# Altium PCB MOTION DETECTOR LIGHT.PcbDoc
Units mm, origin at the board's own origin, x right, y up, seen from the top; angles counter-clockwise.
Board outline 60.5 x 41.5 mm, 4 copper layers (Top Layer, Layer 1, Layer 2, Bottom Layer), stack 1.569 mm thick; 23 components, 15 nets, 73 pads, 20 vias.
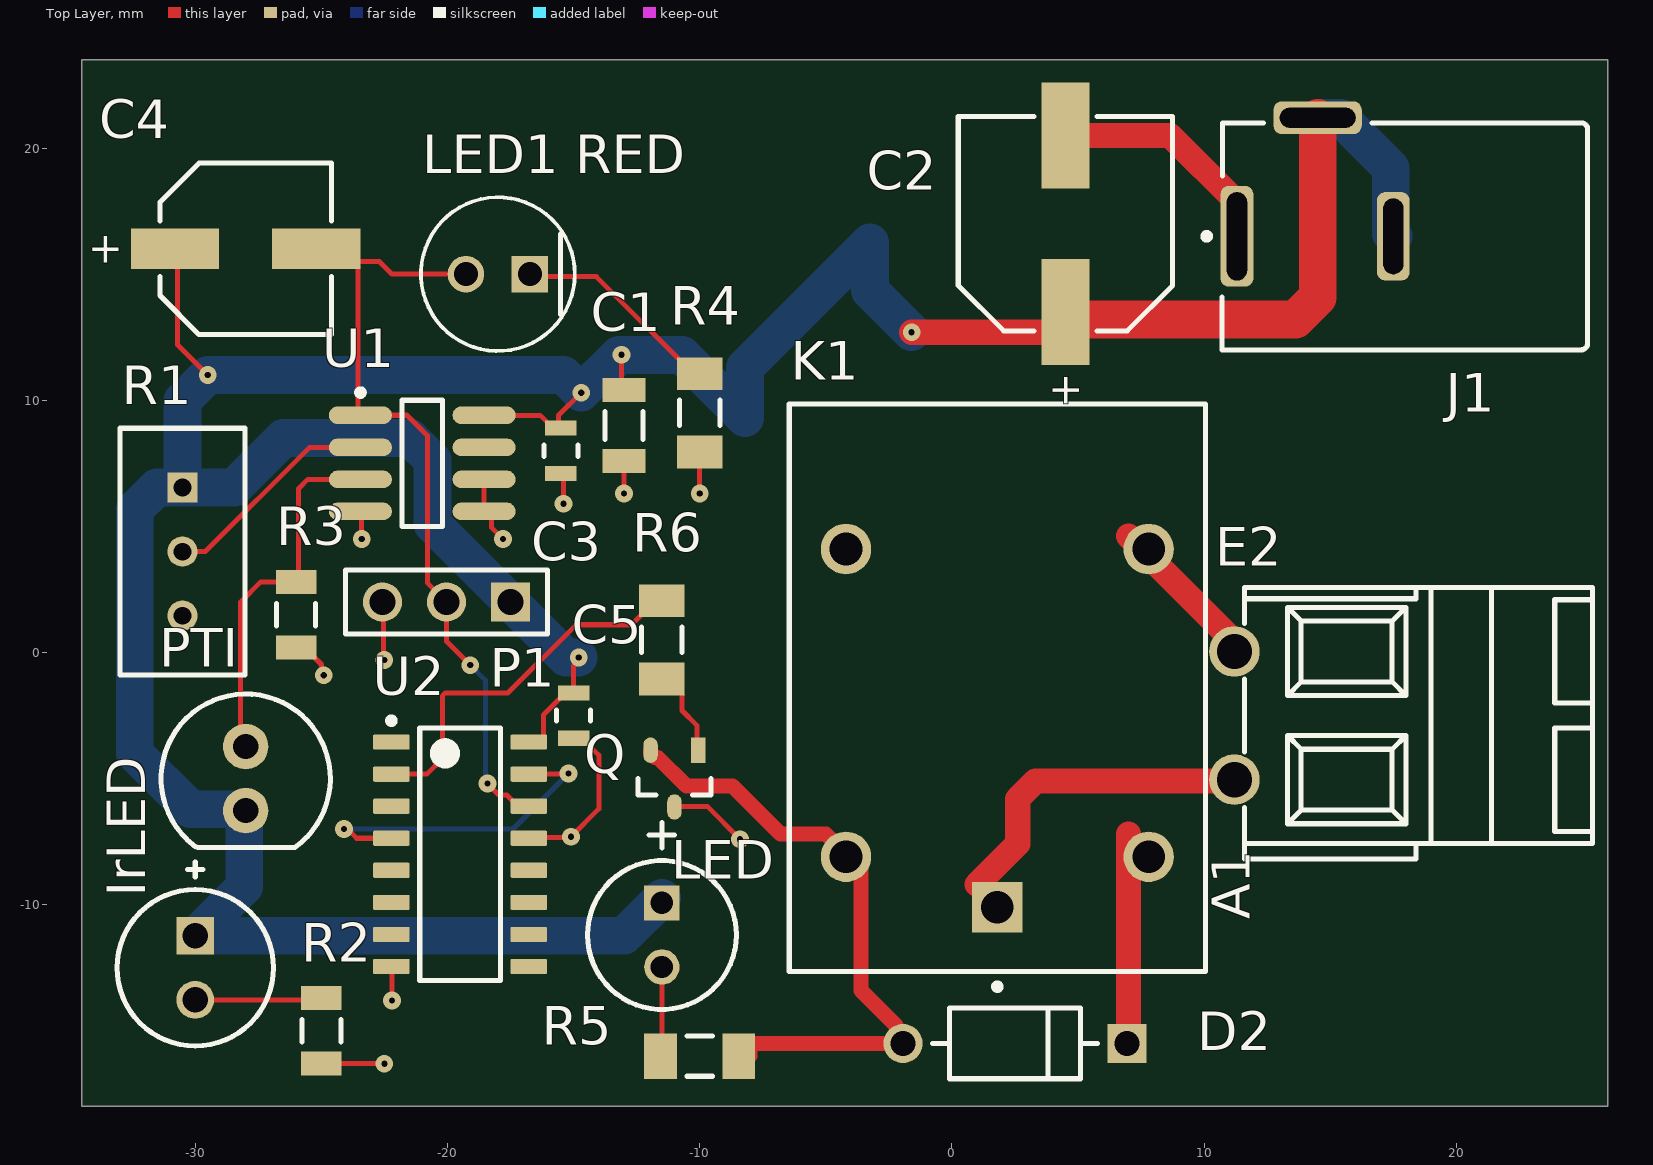
[diagram p0: Top Layer view]
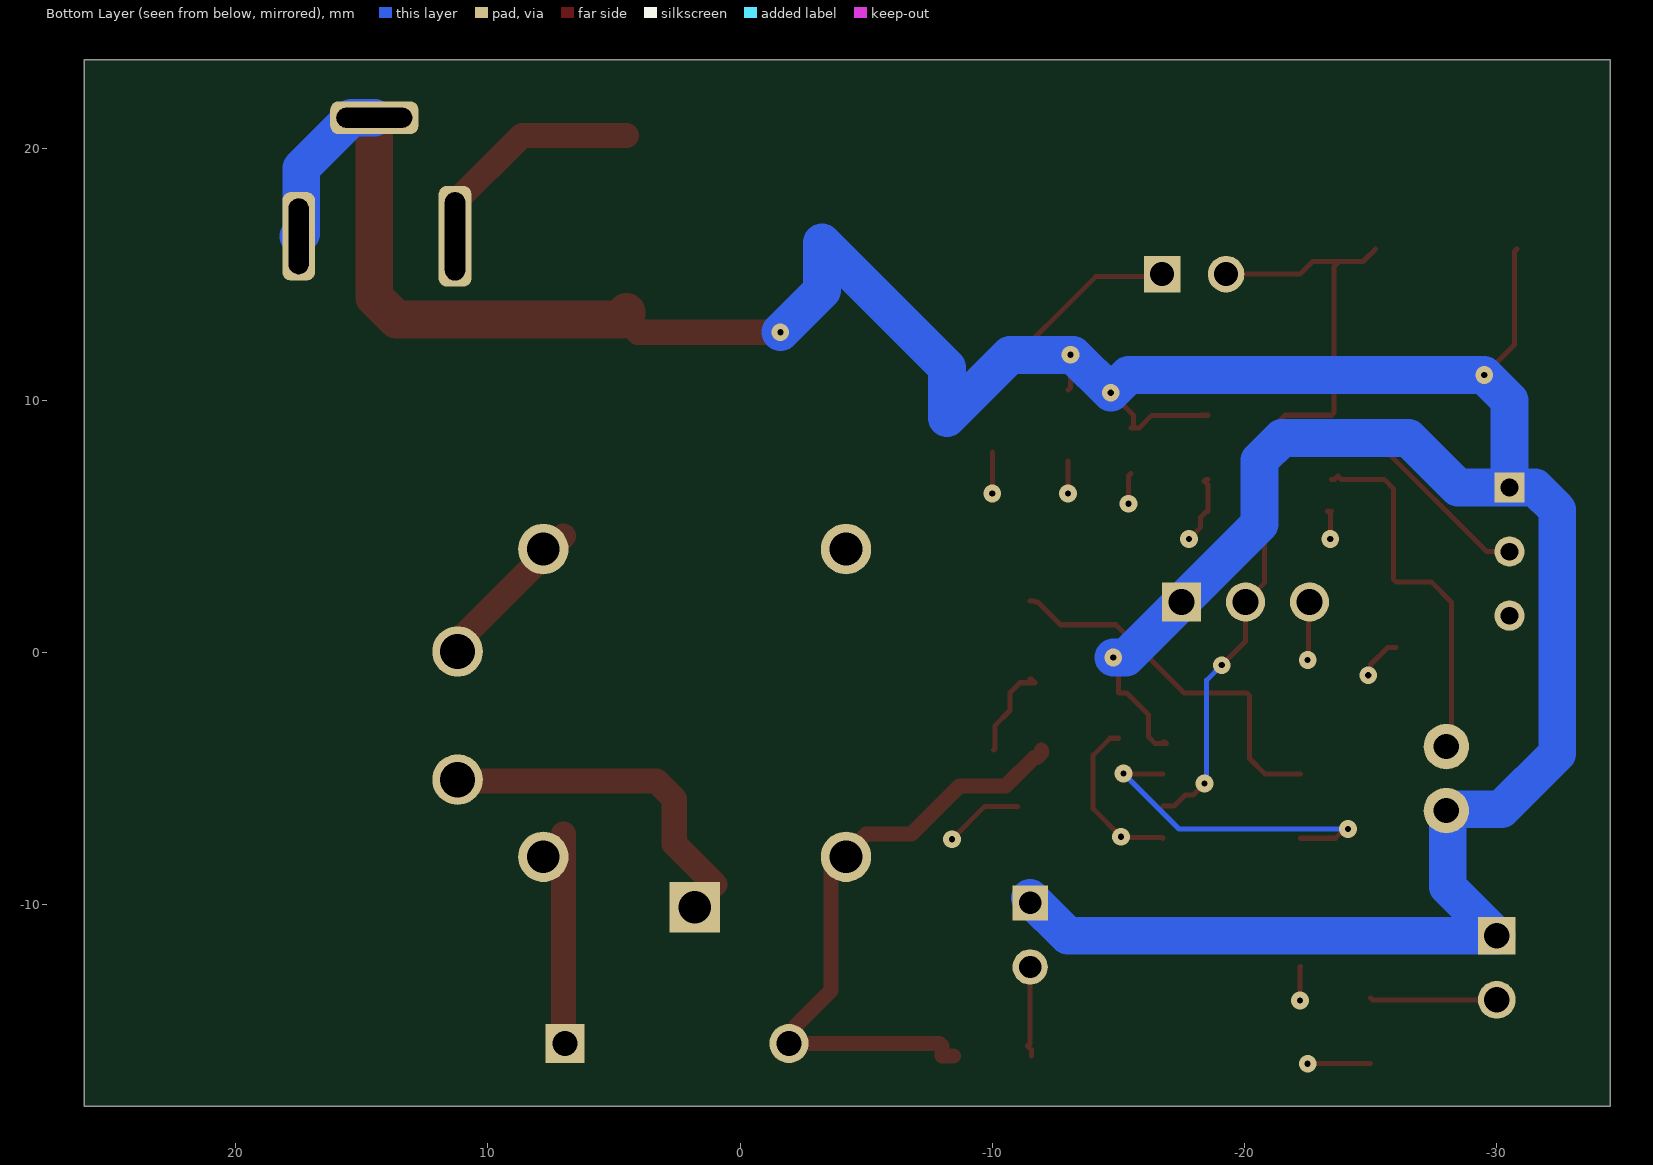
[diagram p1: Bottom Layer view, seen from below]
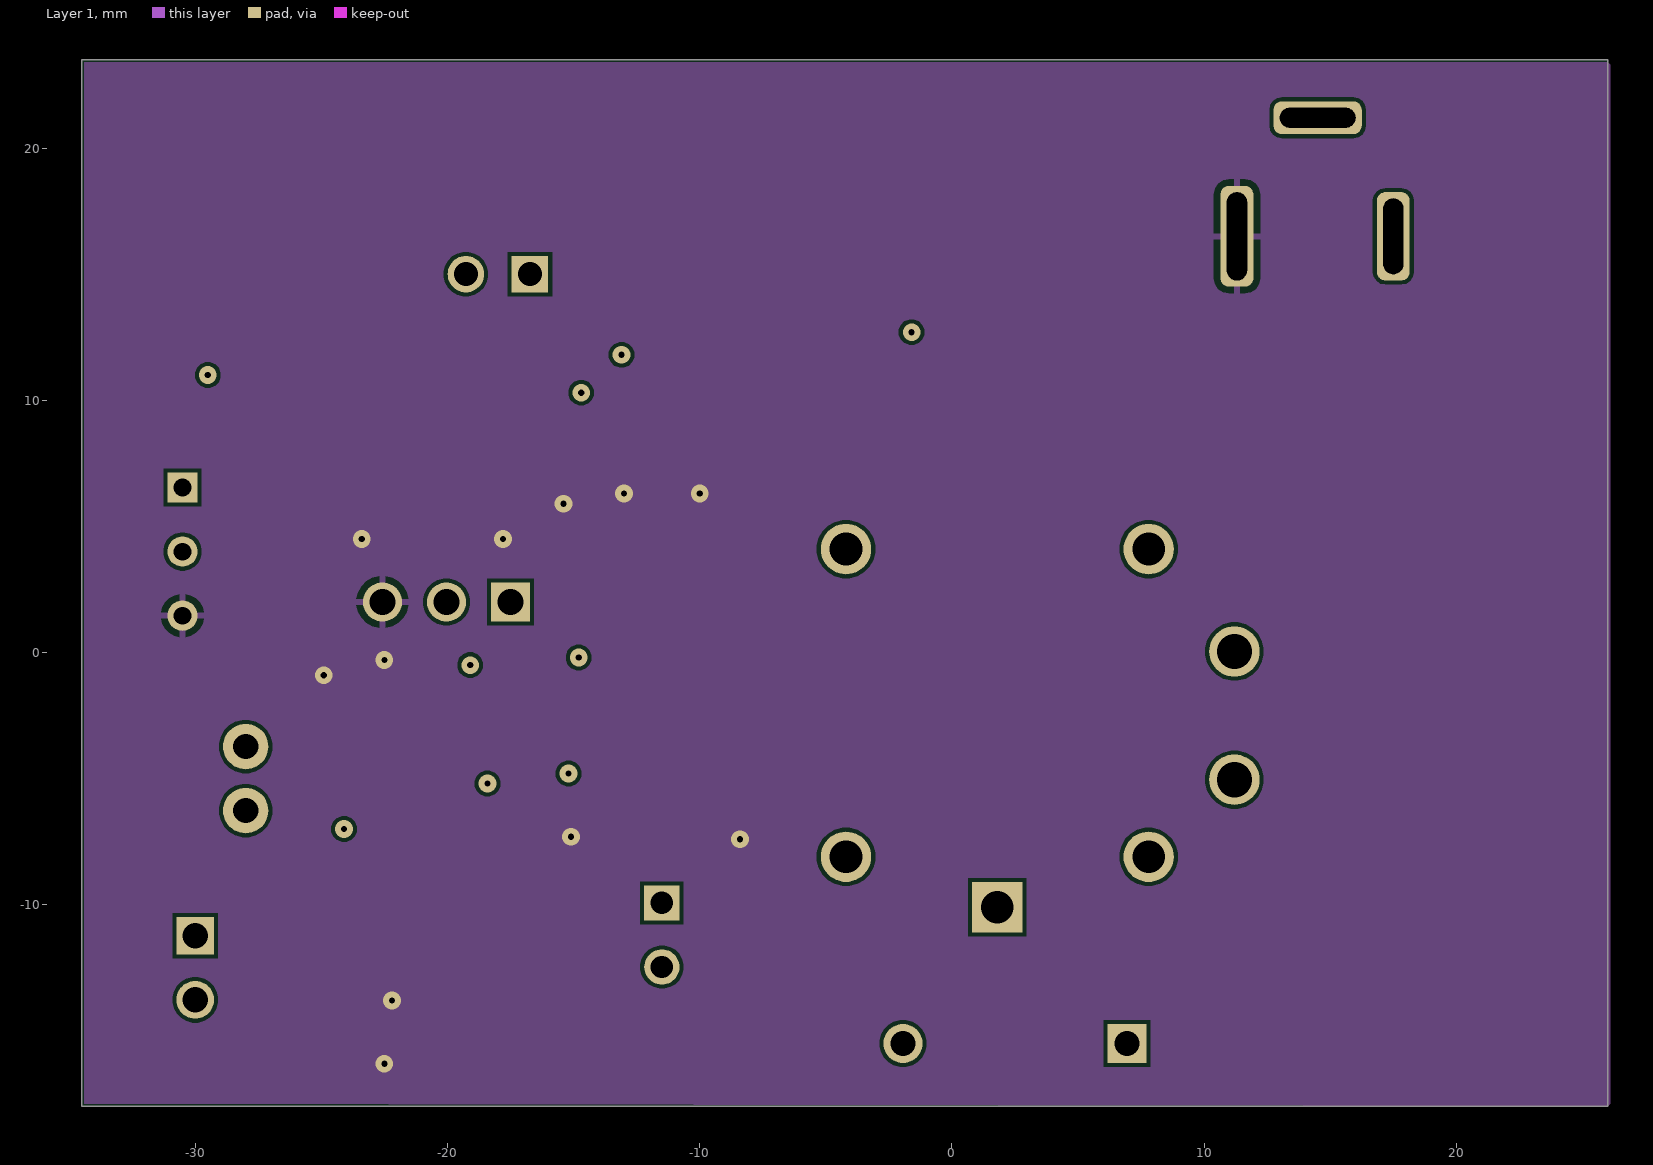
[diagram p2: Layer 1]
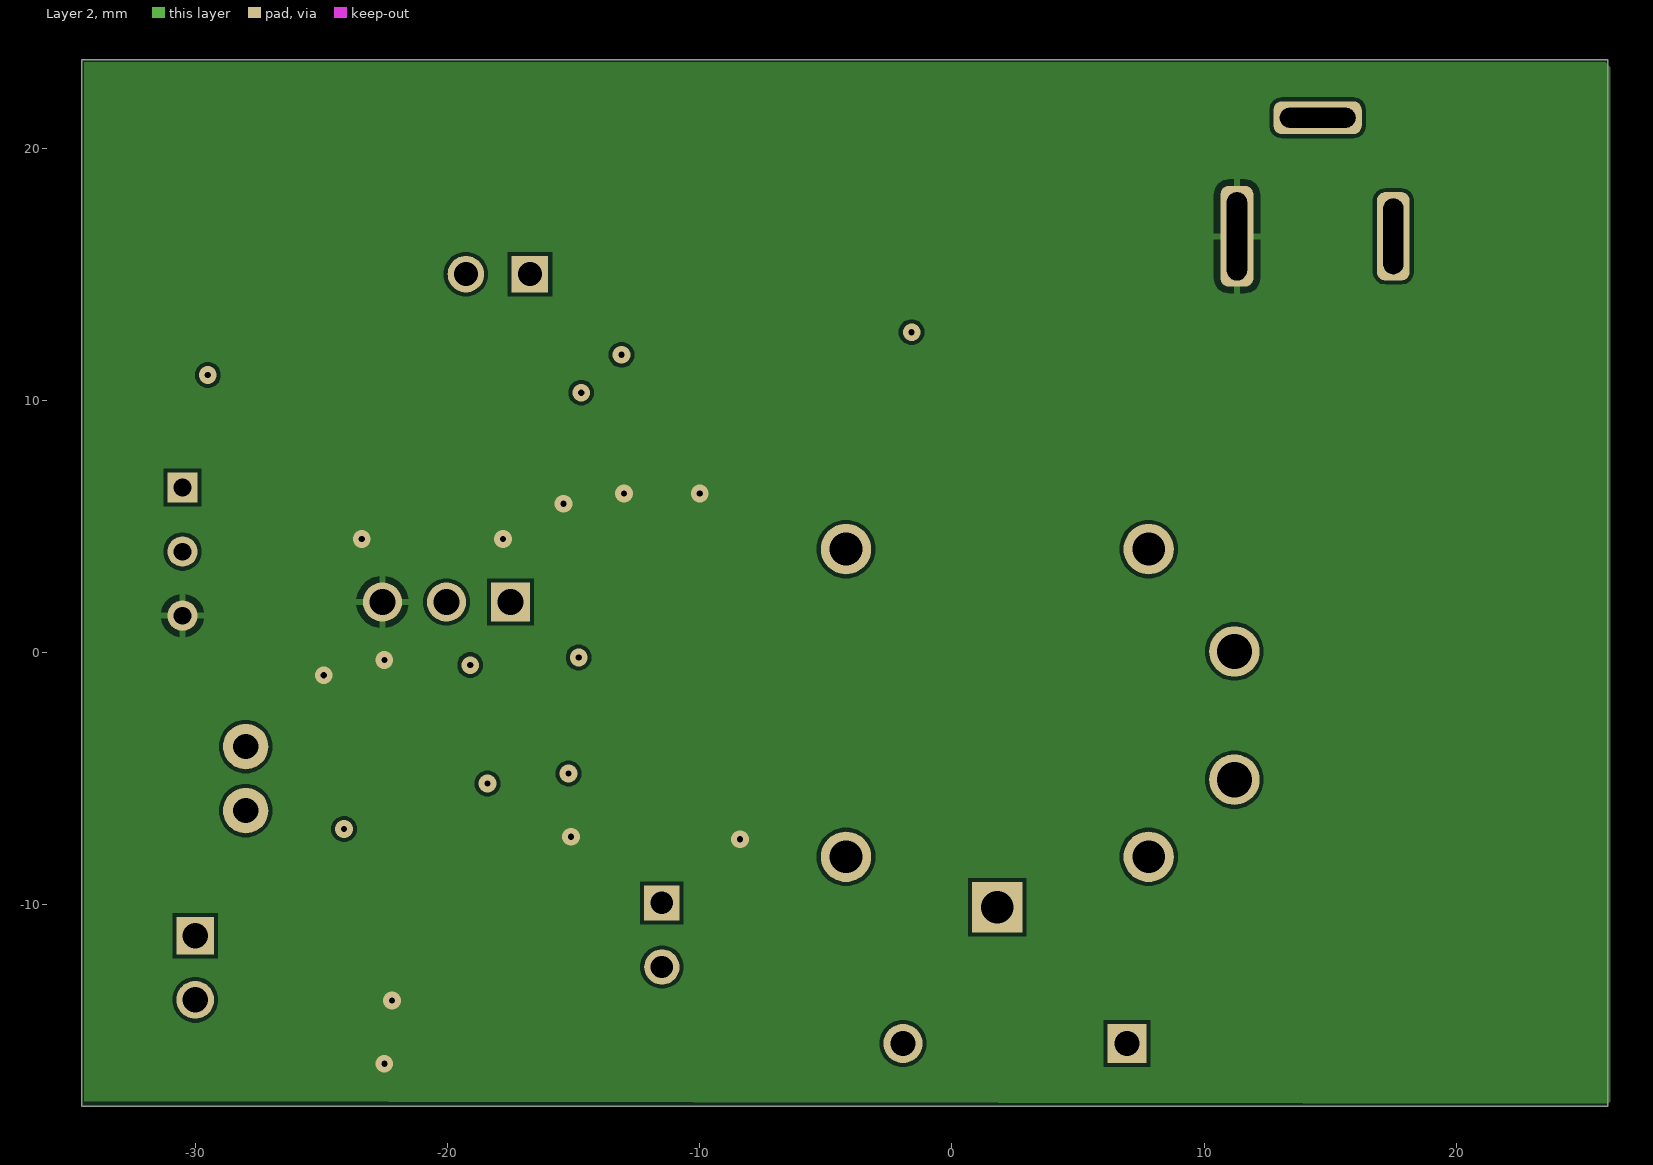
[diagram p3: Layer 2]
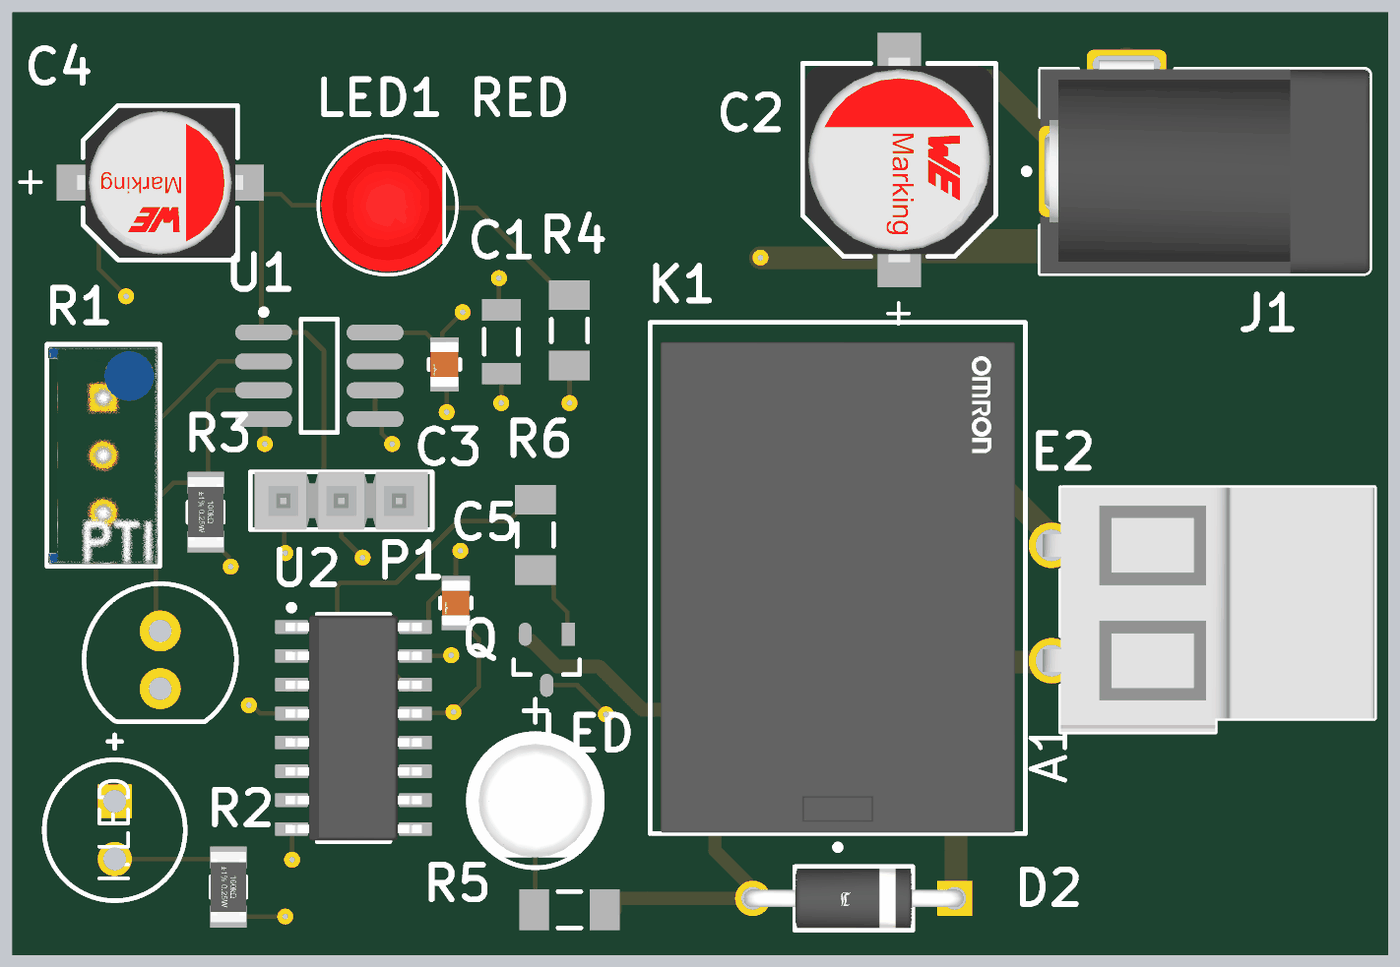
[diagram p4: 3D render of the assembled board from above, using the file's embedded part models]

## Layer stack, top to bottom
Top Solder: solder mask 0.0102, Solder Resist, Dk 3.5
Top Layer: signal copper 0.0356
Dielectric 2: prepreg 0.2184, PP-023, Dk 4.5
Layer 1: signal copper 0.035
Dielectric 1: core 0.9906, Core-042, Dk 4.6
Layer 2: signal copper 0.035
Dielectric 3: prepreg 0.2184, PP-023, Dk 4.5
Bottom Layer: signal copper 0.0356
Bottom Solder: solder mask 0.0102, Solder Resist, Dk 3.5

## Board outline
-34.5,-18 26,-18 26,23.5 -34.5,23.5

## Design rules (kind name [scope] priority, off if disabled: settings)
Clearance [All] p1: gap=0.15 ignorepadtopadclearanceinfootprint=FALSE
PolygonConnect [All] p1: thpad.connectstyle=Relief thpad.reliefconductorwidth=0.254 thpad.reliefentries=4 thpad.polygonreliefangle="90 Angle" thpad.airgapwidth=0.254 smdpad.connectstyle=Relief smdpad.reliefconductorwidth=0.254 smdpad.reliefentries=4 smdpad.polygonreliefangle="90 Angle" smdpad.airgapwidth=0.254 via.connectstyle=Direct via.reliefconductorwidth=0.254 via.reliefentries=4 via.polygonreliefangle="90 Angle" via.airgapwidth=0.254
RoutingVias [All] p1: holewidth=0.25 width=0.7 viastyle="Through Hole" minholewidth=0.25 minwidth=0.7 maxholewidth=0.25 maxwidth=0.7
SolderMaskExpansion [All] p1: expansion=0 istentingtop=FALSE
SupplyNets "Schematic Supply Nets_1" [InNet('+5')] p1: voltage=0.000
SupplyNets "Schematic Supply Nets" [InNet('GND')] p2: voltage=0.000
Width [All] p1: maxlimit=2 minlimit=0.15 preferedwidth=0.2
30 further rules are at their usual default settings.

## Classes and differential pairs
component class "Motion Control Inputs": C1 C3 C4 IrLED J1 "LED1 RED" P1 PTI R1 R2 R3 R4 U1
component class "Counter Switch": C5 D2 E2 K1 LED Q R5 R6 U2

## Components (designator, comment, footprint, x,y, rotation, side; value= is the part's Value field where it differs from the comment)
C1 "1uF" CAPC1206(3216)130_L -13,9 r90 top
C2 "470uF" WCAP-ASLL_D8H10.5 4.5,17 r270 top
C3 "0.1uF" FP-GRM21B-0_1-MFG -15.5,8 r270 top
C4 "100uF" WCAP-AS5H_D6.3H5.5 -28,16 r180 top
C5 "0.1uF" FP-GRM21B-0_1-MFG -15,-2.5 r270 top
D2 "1N4007" FP-1N4007-MFG 2.5,-15.5 r180 top value=15pF
E2 "1716100000" LM_5_08_180_02 18.5,-2.5 r90 top
IrLED "" EVRL-IR333C -30,-12.5 r270 top
J1 "PWR-IN" KYCN-KLDX-0202-A_V 17.5,16.5 r0 top
K1 "RELAY" FP-G5LE-1-E-36-DC5-MFG 1.8,-1.4 r270 top
LED "GREEN" KING-WP7113SGD_V -11.5,-11.2 r270 top
"LED1 RED" "HLMP-4700" FP-HLMP-4700-MFG -18,15 r180 top
P1 "TEST" SMTC-TSW-103-07-X-S -17.5,2 r180 top
PTI "NPN" PhotoTr_PT3347-6B -28,-5 r270 top
Q "2N7002" FP-PG-SOT23-3-IPC_B -11,-5 r270 top
R1 "10k" FP-3296W-MFG -30.5,4 r180 top
R2 "10k" FP-CRGCQ1206-IPC_C -25,-15 r270 top value=10KΩ
R3 "10k" FP-CRGCQ1206-IPC_C -26,1.5 r270 top value=10KΩ
R4 "220" RESC3216X60X45ML10T20 -10,9.5 r270 top
R5 "220" RESC3216X60X45ML10T20 -10,-16 r180 top
R6 "220" RESC3216X60X45ML10T20 -11.5,0.5 r270 top
U1 "" M08A_M -21,7.5 r0 top
U2 "CD4017BM96" D0016A_N -19.5,-8 r0 top

## Footprints (in the part's own frame and the unit in brackets; to place one, negate y for a bottom-side part, rotate by r counter-clockwise, add the part's x,y. Pads: shape width x height; smd on the part's side, far side on the other; paste and mask are expansions set on the pad)
CAPC1206(3216)130_L [mm] "Chip Capacitor, Body 3.2x1.6mm, Height 1.3mm, IPC High Density"
  rect 0.95x1.7 smd: 1(-1.4,0) 2(1.4,0)
  silkscreen extent -0.55,-0.75 0.55,0.75, body extent -1.7,-1 1.7,0.9, height 1.3
D0016A_N [mm] "SOIC, 16-Leads, Body 10x4mm, Pitch 1.27mm, IPC Medium Density"
  rrect17% 1.45x0.6 smd: 1(-2.725,4.445) 2(-2.725,3.175) 3(-2.725,1.905) 4(-2.725,0.635) 5(-2.725,-0.635) 6(-2.725,-1.905) 7(-2.725,-3.175) 8(-2.725,-4.445) 9(2.725,-4.445) 10(2.725,-3.175) 11(2.725,-1.905) 12(2.725,-0.635) 13(2.725,0.635) 14(2.725,1.905) 15(2.725,3.175) 16(2.725,4.445)
  silkscreen extent -2.85,-5 1.6,5.42, body extent -3,-4.95 3,4.95, height 1.59
EVRL-IR333C [mm] "TH, 2-Leads, Radius 2.95mm, Pitch 2.54mm"
  rect 1.5x1.5 hole 1: 1(-1.27,0)
  round 1.5 hole 1: 2(1.27,0)
  silkscreen extent -4.2,-3.1 3.1,3.1, body extent -2.95,-2.95 2.95,2.95, height 10.4
FP-1N4007-MFG [mm]
  rect 1.55x1.55 hole 1 paste-2539.97 mask+0: 1(-4.44,0)
  round 1.55 hole 1 paste-2539.97 mask+0: 2(4.44,0)
  silkscreen extent -3.26,-1.4 3.26,1.4, body extent -5.32,-1.5 5.32,1.5, height 0.25
FP-3296W-MFG [mm]
  rect 1.2x1.2 hole 0.7 paste-2539.97 mask+0: 1(0.005,-2.54)
  round 1.2 hole 0.7 paste-2539.97 mask+0: 2(0.005,0) 3(0.005,2.54)
  silkscreen extent -2.48,-4.89 2.48,4.89, body extent -2.58,-4.99 2.58,4.99, height 0.25
FP-CRGCQ1206-IPC_C [mm]
  rect 0.956x1.61 smd paste+0 mask+0: 1(-1.301,0) 2(1.301,0)
  silkscreen extent -0.45,-0.77 0.45,0.77, body extent -1.88,-0.95 1.88,0.95, height 0.25
FP-G5LE-1-E-36-DC5-MFG [mm]
  rect 2x2 hole 1.3 paste-2539.97 mask+0: 1(8.7,0)
  round 2 hole 1.3 paste-2539.97 mask+0: 2(6.7,6) 3(-5.5,6) 4(-5.5,-6) 5(6.7,-6)
  silkscreen extent -11.25,-8.25 11.97,8.25, body extent -11.35,-8.35 11.35,8.35, height 0.25
FP-GRM21B-0_1-MFG [mm]
  rect 0.6x1.25 smd paste+0 mask+0: 1(-0.9,0) 2(0.9,0)
  silkscreen extent -0.23,-0.67 0.23,0.67, body extent -1.3,-0.77 1.3,0.77, height 0.25
FP-HLMP-4700-MFG [mm]
  rect 1.45x1.45 hole 0.95 paste-2539.97 mask+0: 1(-1.27,0)
  round 1.45 hole 0.95 paste-2539.97 mask+0: 2(1.27,0)
  silkscreen extent -3.05,-3.05 3.05,3.05, body extent -3.15,-3.15 3.15,3.15, height 0.25
FP-PG-SOT23-3-IPC_B [mm]
  rect 1.008x0.576 smd paste+0 mask+0: 1(-1.125,0.95)
  rrect100% 1.008x0.576 smd paste+0 mask+0: 2(-1.125,-0.95) 3(1.125,0)
  silkscreen extent 0,-1.45 0.65,1.45
KING-WP7113SGD_V [mm] "THD, 2-Leads, Dia 5.9mm, Body Length 8.6mm"
  rect 1.4x1.4 hole 0.889: 1(-1.27,0)
  round 1.4 hole 0.889: 2(1.27,0)
  silkscreen extent -4.47,-2.95 2.95,2.95, body extent -2.95,-2.95 2.5,2.95, height 15.5
KYCN-KLDX-0202-A_V [mm] "Power Jack, 3-Leads, Body 14.5x9mm"
  rrect50% 1.3x4 hole 0.8 slot 3.5 at 90 deg: 1(-6.2,0)
  rrect50% 1.3x3.5 hole 0.8 slot 3 at 90 deg: 2(0,0)
  rrect50% 3.5x1.3 hole 0.8 slot 3 at 0 deg: 3(-3,4.7)
  silkscreen extent -7.52,-4.5 7.7,4.5, body extent -6.8,-4.5 7.7,4.9, height 10.8
LM_5_08_180_02 [mm] "OMNIMATE Signal - Serie LM  LM 5.08/02/180 3.5"
  round 2 hole 1.4: A1(-2.54,7.3) A2(2.54,7.3)
  silkscreen extent -5.68,-6.9 5.08,6.9, body extent -5.68,-6.9 5.08,7.7, height 10.01
M08A_M [mm] "SOIC, 8-Leads, Body 4.9x3.9mm, Pitch 1.27mm, IPC Low Density"
  oval 2.5x0.7 smd: 1(-2.45,1.905) 2(-2.45,0.635) 3(-2.45,-0.635) 4(-2.45,-1.905) 5(2.45,-1.905) 6(2.45,-0.635) 7(2.45,0.635) 8(2.45,1.905)
  silkscreen extent -2.57,-2.5 0.8,2.93, body extent -2,-2.5 2,2.5, height 1.75
PhotoTr_PT3347-6B [mm]
  round 1.8 hole 1: 1(-1.27,0) 2(1.27,0)
  silkscreen extent -3.35,-3.35 2.73,3.35, body extent -3.1,-3.11 2.5,3.11, height 11.9
RESC3216X60X45ML10T20 [mm] "Chip Resistor, 2-Leads, Body 3.20x1.60mm, IPC Low Density"
  rect 1.3x1.8 smd: 1(-1.55,0) 2(1.55,0)
  silkscreen extent -0.5,-0.8 0.5,0.8, body extent -1.65,-0.85 1.65,0.85, height 0.6
SMTC-TSW-103-07-X-S [mm] ".025 SQ Post Terminal Strip Assembly, 1x3 Pins, Vertical, 2.54mm Pitch, Male"
  rect 1.55x1.55 hole 1.02: 1(0,0)
  round 1.55 hole 1.02: 2(2.54,0) 3(5.08,0)
  silkscreen extent -1.46,-1.27 6.54,1.27, body extent -1.27,-1.27 6.35,1.27, height 8.38
WCAP-AS5H_D6.3H5.5 [mm] "Aluminum Electrolytic Capacitors, 6.3x5.5mm"
  rect 3.5x1.6 smd: 1(2.8,0) 2(-2.8,0)
  silkscreen extent -3.4,-3.4 3.4,3.4, body extent -3.65,-3.3 3.65,3.3, height 5.5
WCAP-ASLL_D8H10.5 [mm] "Aluminium Electrolytic V-Chip SMT Capacitors, 8x10.5mm"
  rect 4.2x1.9 smd: 1(3.5,0) 2(-3.5,0)
  silkscreen extent -4.25,-4.25 4.25,4.25, body extent -4.5,-4.15 4.5,4.15, height 10.5

## Part data
C1: library part "CAP 1uF 10V", "CAP 1uF 10V ±5% 1206 (3216 Metric) Thickness 1.3mm SMD", Case-EIA=1206, Case-Metric=3216, Rated Voltage="10 V", Tolerance=Â±5%, Max Thickness="1.3 mm", Technology=SMT
C2: library part "CAP POL 470uF 6.3V", "WCAP-ASLL Aluminum Electrolytic Capacitors", Capacitance=470µF, Case/Package=Radial, ESR (Equivalent Series Resistance)=124.302mΩ, Insulation Resistance=212.766kΩ, Leakage Current=29.61µA, Max Operating Temperature=105°C, Min Operating Temperature=-55°C, Ripple Current=500mA, Tolerance=20%, Voltage Rating=6.3V, Diameter=8mm, Height=10.5mm, Height - Seated (Max)=10.4902mm, Impedance=170mΩ, Length=10.5mm, Life (Hours)=5000hours, Mount="Surface Mount", Polarity=Polar, REACH SVHC=Unknown, Ripple Current (AC)=500mA, RoHS=Compliant, Voltage Rating (DC)=6.3V
C3 C5: library part "CAP 0.1uF 10V 0805", "Chip Multilayer Ceramic Capacitors for General Purpose, 0805, 0.10uF, U2J, -750ppm/°C, 5%, 10V", Capacitance=100nF, Case/Package=0805, Dielectric=U2J, Tolerance=5%, Voltage Rating (DC)=10V, Length=2mm, Thickness=1.25mm, Width=1.25mm
C4: library part "CAP POL 100uF 6.3V", "WCAP-AS5H Aluminum Electrolytic Capacitors", Capacitance=100µF, Case/Package=Radial, Insulation Resistance=1MΩ, Leakage Current=6.3µA, Max Operating Temperature=105°C, Min Operating Temperature=-40°C, Ripple Current=60mA, Tolerance=20%, Voltage Rating=6.3V, Diameter=6.3mm, Height=5.5mm, Height - Seated (Max)=5.5118mm, Length=5.5mm, Life (Hours)=5000hours, Mount="Surface Mount", Polarity=Polar, REACH SVHC=Unknown, Ripple Current (AC)=60mA, RoHS=Compliant, Voltage Rating (DC)=6.3V, Width=6.6mm
D2: library part "D2 Diode 1N4007", "Rectifier diode 1000 V 1 A DO-41, ,", Capacitance=15pF, Forward Current=1A, Manufacturer=Diotec, Max Junction Temp=+175°C, Max Repetitive Reverse Voltage=1000V, Max Surge Forward Current=27A, Peak Reverse Current=5uA, Temperature="-50°C to +175°C", Temperature Range Low=-50°C, Automotive=No, Category=Diode, ComponentLink2Description=Datasheet, ComponentLink2URL=https://datasheet.octopart.com/1N4007-Diotec-datasheet-62346875.pdf, Device Class L1="Discrete Semiconductors", Device Class L2=Diodes, Device Class L3="Rectifier Diodes", Height=2.8mm, Ipc Land Pattern Name=DIOAD888W100L520D280, Lead Free=Yes, Manufacturer Part Number=1N4007, Octopart=https://octopart.com/1n4007-diotec-4040411, Package=1N4007, Reverse Voltage=1000V, RoHS=TRUE, Temperature Range High=+175°C
E2: library part "Term Block 2Pos 14AWG", "OMNIMATE Signal - series LM", Colour=Orange, Manufacturer=Weidmueller, Rated_current_use_group_B_UL_1059="15 A", Rated_voltage_for_surge_voltage_class_pollution_degree_II_2="630 V", Rated_voltage_use_group_B_UL_1059="300 V", UL_94_flammability_rating=V-0, ComponentLink1Description="Manufacturer URL", ComponentLink1URL=http://www.weidmueller.com/, ComponentLink2Description="URL Link1", ComponentLink2URL=http://catalog.weidmueller.com/catalog/Start.do?localeId=en&ObjectID=1716100000, Contact_material=Cu-Leg, Contact_surface=tinned, Insulating_material="Wemid (PA)", Mounting_onto_the_PCB="Solder connection", No_of_poles=2, PackageReference=LM_5_08_180_02, Packaging=Box, PartNumber=1716100000, Pitch_inch="0,2 inch", Pitch_mm="5,08 mm", Qty="500 PCS", Revision=V1, Short_text_for_material="LM 5.08/02/180 3.5SN OR BX", Side_termination_characteristic="closed side", Solder_pin_length_mm="3,5 mm", Solid_max_H05_07_V_U="2,5 mm²", Solid_min_H05_07_V_U="0,2 mm²", Wire_cross_section_AWG_max_UL_1059="AWG 14", Wire_cross_section_AWG_min_UL_1059="AWG 24"
IrLED: library part "IR Emitter 5mm", "Infrared LED, 1.2 V, -40 to 85 degC, 2-Pin Radial, RoHS, Bulk", Forward Current=20mA, Forward Voltage=1.2V, Illumination Color=Infrared, Manufacturer="Everlight Electronics", Maximum Forward Current=1A, Maximum Operating Temperature=+85C, Minimum Operating Temperature=-40C, Package / Case=T-13/4, Power Rating=150mW, Brand=Everlight, Datasheet URL=http://www.everlight.com/file/ProductFile/201407061521223111.pdf, Datasheet Version=May-13, Factory Pack Quantity=500, Lens Shape=Dome, Manufacturer URL=http://www.everlight.com/, Mounting Style=ThroughHole, Operating Voltage=1.2V, Product Category=InfraredEmitters, Radiant Intensity=12mW/sr, RoHS=Details, Viewing Angle=40deg, Wavelength=940nm
J1: library part "Conn DC Power Jack 2mm", "DC Power Jack, 24 V, 3.5 A, -25 to 85 degC, 3-Pin THD, RoHS", Colour=Black, Current Rating="3.5 A", Manufacturer=Kycon, Max Operating Temperature="85 degC", Min Operating Temperature="-25 degC", Package Quantity=500, Voltage Rating="24 V", ComponentLink1Description="Manufacturer URL", ComponentLink1URL=http://www.kycon.com/, ComponentLink2Description=Datasheet, ComponentLink2URL=http://www.kycon.com/Pub_Eng_Draw/KLDX-0202-X.PDF, Connector Type=Power, Contact Gender=Female, Contact Material=Brass, Contact Plating=Tin, DatasheetVersion="Rev. D3, 06/2013", Height="10.8 mm", Housing Material=PBT, Length="9.2 mm", Mount="Through Hole", Mounting Technology="Through Hole", PackageDescription="3-Pin Through Hole Device, Body 14.5 x 9 mm", PackageReference=KLDX-0202-A, Pins=2, RoHSCompliant=true
K1: library part "RELAY SPDT 5V", "RELAY GEN PURPOSE SPDT 16A 5V", Coil Current=72mA, Coil Power=360mW, Coil Resistance=70R, Coil Voltage (DC)=5V, Contact Current Rating=16A, Max Operating Temperature=85°C, Min Operating Temperature=-40°C, Package Quantity=100, Power Consumption=400mW, Coil Type=Non-Latching, Contact Material=Tin, Mount="Through Hole", Operate Time=10ms, Packaging=Tray, Relay Type="General Purpose", Release Time=5ms, Series=G5LE-E, Termination="PC Pin", Throw Configuration=SPDT
LED: library part "LED Green 5mm", "LED Green, 62.5 mW, 25 mA, -40 to 85 degC, 2-Pin THD, RoHS, Bulk", Case/Package=Radial, Colour=Green, Forward Voltage=2.2V, Manufacturer=Kingbright, Package Description="2-Pin Through Hole Device, Dia 5.9 mm, Body Length 8.6 mm", Package Quantity=1000, Package Reference=WP7113SGD, Test Current=20mA, Datasheet URL=http://www.kingbrightusa.com/images/catalog/SPEC/WP7113SGD.pdf, Datasheet Version="Rev. 6B, 01/2015", Dominant Wavelength=568nm, Height=8.6mm, Illumination Colour=Green, Lead Free=LeadFree, Lens Style=Tinted, Luminous Intensity=40mcd, Packaging=Bulk, RoHSCompliant=true, Viewing Angle=30degrees, Wavelength=568nm
"LED1 RED": library part "LED Red 5mm", "LED RED DIFFUSED T-1 3/4 T/H", Colour=Red, Forward Current=2mA, Forward Voltage=1.7V, Manufacturer=Broadcom, Power Dissipation=14mW, Reverse Voltage=5V, Temperature="-40°C to +100°C", Temperature Range High=+100°C, Temperature Range Low=-40°C, Automotive=No, Category=Diode, ComponentLink2Description=Datasheet, ComponentLink2URL=https://docs.broadcom.com/docs/AV02-1557EN, Device Class L1=Optoelectronics, Device Class L2=LEDs, Device Class L3=unset, Digikey Description="LED RED DIFFUSED T-1 3/4 T/H", Lead Free=Yes, Led Orientation=Straight, Luminous Intensity=2.3mcd, Manufacturer Part Number=HLMP-4700, Mouser Description="LED; Red; 2.3mcd; 0.24In.Dia.; T-1-3/4; 500mA; 1.7V; 635nm; 50deg; 5V; 24mW; -55degC;", Octopart=https://octopart.com/hlmp-4700-broadcom-71130526, Package=HLMP-4700, Peak Emmision Wavelength=635nm, RoHS=TRUE, Viewing Angle=50°, Wavelength=626nm
P1: library part "Header 3POS 0.1\" TH Single Row", "0.025\" SQ Post Header, Through-hole, Vertical, -55 to 125 degC, 2.54 mm Pitch, 3-Pin, Male, RoHS", Manufacturer=Samtec, PartNumber=TSW-103-07-F-S, Temperature Range="-55 to 125 degC", ComponentLink1Description="Manufacturer URL", ComponentLink1URL=http://www.samtec.com, ComponentLink2Description=Datasheet, ComponentLink2URL=http://www.samtec.com/documents/webfiles/pdf/TSW_TH.PDF, ComponentLink3Description="Package Specification", ComponentLink3URL=http://www.samtec.com/documents/webfiles/cpdf/TSW-XXX-XX-XXX-X-XX-XXX-MKT.pdf, DatasheetVersion=F-214, Mounting Technology=Through-hole, Orientation=Vertical, PackageDescription=".025[0.64] SQ. Post Terminal Strip Assembly", PackageReference=TSW-103-07-X-S, PackageVersion="DM, 8/1988", Pitch="2.54 mm", RoHS=True
PTI: library part Phototransistor, "iber Optic Transceivers; PT334-6B; EVERLIGHT; 2; 940 nm; Through Hole; Yes", Manufacturer=Everlight, Manufacturer Part Number=PT334-6B
Q: library part "MOSFET 2N7002 SMT", "MOSFET N-CH 60V 0.3A SOT23", Case/Package=SOT-23, Continuous Drain Current (ID)=300mA, Drain to Source Voltage (Vdss)=60V, Gate to Source Voltage (Vgs)=20V, Input Capacitance=20pF, Max Operating Temperature=150°C, Max Power Dissipation=500mW, Min Operating Temperature=-55°C, Halogen Free="Halogen Free", Lead Free="Lead Free", Max Dual Supply Voltage=60V, Mount="Surface Mount", Number of Pins=3, Packaging="Tape and Reel", Rds On Max=3R, Rise Time=3.3ns
R1: library part "10K Trimmer", "TRIMMER 10K OHM 0.5W PC PIN TOP", Max Operating Temperature=125°C, Max Power Dissipation=500mW, Min Operating Temperature=-55°C, Package Quantity=1, Resistance=10kR, Temperature Coefficient=100ppm/°C, Tolerance=10%, Composition=Cermet, Contact Plating=Tin, Depth=4.83mm, Height=0.395inch, Length=9.53mm, Military Standard=Not, Mount="Through Hole", Number of Turns=25, Packaging="Tape and Reel", Power Rating=500mW, Radiation Hardening=No, REACH SVHC="No SVHC", Taper=Linear, Termination=Pin, Weight=0.03oz, Width=0.19inch
R2 R3: library part "Res 10K 1/4W SMT", "CRGCQ1206 10KΩ 0.25W 1% ±100ppm/°C 200V", Ambient Temperature Range High=+70°C, Manufacturer="TE Connectivity", Manufacturer Part Number=CRGCQ1206F10K, Package=CRGCQ1206, Power Rating=0.25W, Resistance=10KΩ, Temperature="-55°C to +155°C", Temperature Coefficient=±100ppm/°C, Temperature Range High=+155°C, Temperature Range Low=-55°C, Tolerance=0.01, Voltage Rating=200V, Automotive=Yes, Automotive Grade="Grade 913", Category=Res, ComponentLink2Description=Datasheet, ComponentLink2URL=https://www.te.com/commerce/DocumentDelivery/DDEController?Action=showdoc&DocId=Data+Sheet%7F1773204-3%7F1%7Fpdf%7FEnglish%7FENG_DS_1773204-3_1.pdf%7F4-2176347-922, Composition="Thick Film", Device Class L1="Passive Components", Device Class L2=Resistors, Device Class L3="Chip SMD Resistors", Height=0.65mm, Ipc Land Pattern Name=RESC310155X55, Lead Free=Yes, Octopart=https://octopart.com/crgcq1206f10k-te+connectivity-91018244, RoHS=TRUE, Series=CRGCQ
R4 R5 R6: library part "Res 220 Ohm 1/4W SMT", Manufacturer="Vishay Dale", Part Number=CRCW1206220RFKEA
U1: library part OPAMP, "High Precision, Rail-to-Rail Output Operational Amplifier, 8-pin Narrow SOIC, Pb-Free", Manufacturer="National Semiconductor", PackageTopMarking=NSZXTT*LMP20*16MA, PowerWise=N, Code_IPC=SOIC127P600-8, Code_JEDEC=MS-012-AA, ComponentLink1Description="LMP2016 Datasheet", ComponentLink1URL=http://www.national.com/ds/LM/LMP2016.pdf, ComponentLink2Description="LMP2016 Web Page", ComponentLink2URL=http://www.national.com/pf/LM/LMP2016.html, ComponentLink3Description="M08A Package Page", ComponentLink3URL=http://www.national.com/packaging/folders/m08a.html, CompType=Amplifiers, DatasheetVersion=Jan-2010, PackageDescription="SOIC Narrow, 4.9 x 3.9 x 1.45mm, 8 Lead, 1.27mm Pitch", PackageReference=M08A, PackageVersion="revM, May-2009", PinCount=8, RevisionNote="Component URLs added", RoHS=Y
U2: library part "IC CD4017", "CMOS Decade Counter with 10 Decoded Outputs, D0016A, LARGE T&R", F @ Nom Voltage(Max)(Mhz)=8, Generic Part Number=CD4017B, ICC @ Nom Voltage(Max)(mA)=0.03, Manufacturer="Texas Instruments", Operating Temperature Range(C)="-55 to 125", Rating=Military, tpd @ Nom Voltage(Max)(ns)=270, Voltage(Nom)(V)=10, Bits(#)=10, Code_JEDEC="MS-012 variation AC", DatasheetVersion=SCHS027C, Function=Counter, Input Type=CMOS, Inputs=1, Output Drive (IOL/IOH)(Max)(mA)=1.5/-1.5, Output Type=CMOS, PackageReference=D0016A, Schmitt Trigger=No, Technology Family=CD4000, Type=Decade, VCC(Max)(V)=18, VCC(Min)(V)=3

## Via types
v1: diameter 0.7, hole 0.25, Top Layer to Bottom Layer, 20 vias

## Nets (pads, with @x,y where several pads share a name; then routed paths per layer and width w, separated by ;. In a path a pad name is that pad's centre, name@x,y a point inside that pad or via, vN(x,y) a via of type N, cw(c..) or ccw(c..) an arc to the next point about the centre after c; other vN are vias at no path point)
+5: C1.2 C2.1 C3.1 C4.1 C5.1 IrLED.1 J1.2 J1.3 LED.1 P1.1 PTI.2 R1.1 U1.8 U2.16 | length 152.9
  Top Layer w0.2: C4.1 -30.7,15.9 -30.7,12.2 v1(-29.5,11) ; U1.8 -18.305,9.405 -18.3,9.4 -16.325,9.4 -15.825,8.9 C3.1 -15.6,8.9 -15.6,9.4 v1(-14.7,10.3) ; U2.16 -16.855,-3.555 -16.9,-3.6 -16.446,-3.6 -16.201,-3.355 -16.201,-2.476 -15.325,-1.6 C5.1 -15,-0.535 -14.8,-0.335 v1(-14.8,-0.2) ; v1(-13.1,11.8) -13.1,10.5 C1.2
  Top Layer w1: v1(-1.6,12.7) 4.05,12.7 4.5,13.15 C2.1
  Top Layer w1.5: C2.1 4.5,13.4 4.7,13.2 13.621,13.2 14.5,14.079 J1.3
  Bottom Layer w1.5: v1(-14.8,-0.2) -15.3,-0.2 P1.1 -20.6,5.1 -20.6,7.621 -21.479,8.5 -26.5,8.5 -28.46,6.54 R1.1 ; LED.1@-11.5,-9.73 -13,-11.23 IrLED.1 -28.057,-9.287 -28.057,-6.327 PTI.2 -28.057,-6.213 -30.187,-6.213 -32.4,-4 -32.4,5.661 -31.521,6.54 R1.1 ; v1(-1.6,12.7) -3.25,14.35 -3.25,16.25 -8.2,11.3 -8.2,9.3 -10.7,11.8 v1(-13.1,11.8) -13.2,11.8 v1(-14.7,10.3) -15.4,11 v1(-29.5,11) -30.505,9.995 R1.1 ; J1.3 15.4,21.2 17.4,19.2 17.4,16.6 J1.2
GND: C1.1 C2.2 C3.2 C5.2 J1.1 P1.3 Q.3 R1.3 R2.2 R3.2 R4.2 U1.4 U1.5 U1.6 U2.8 U2.13 | length 36.1
  Top Layer w0.2: R1.3@-30.832,1.133 -30.733,1.133 -30.7,1.1 -30.505,1.295 R1.3 ; R3.2 -25.673,0.199 -24.996,-0.479 -24.996,-0.804 v1(-24.9,-0.9) ; R2.2 -24.701,-16.301 -24.7,-16.3 v1(-22.5,-16.3) ; U1.4 U1.4@-23.305,5.595 ; v1(-23.4,4.5) -23.4,5.5 U1.4@-23.3,5.6 ; P1.3 -22.5,2 -22.4,1.9 -22.54,1.76 -22.54,-0.26 v1(-22.5,-0.3) ; U2.8 -22.2,-12.47 v1(-22.2,-13.8) ; U1.6 -18.465,6.865 -18.4,6.8 -18.55,6.65 U1.5 -18.491,5.595 -18.26,5.364 -18.26,4.96 v1(-17.8,4.5) ; U2.13 -16.743,-7.332 -15.132,-7.332 v1(-15.1,-7.3) -14,-6.2 -14,-4.075 -14.675,-3.4 C5.2 ; C3.2 -15.4,7 v1(-15.4,5.9) ; v1(-13,6.3) C1.1 ; Q.3 -11,-6.1 -9.7,-6.1 v1(-8.4,-7.4) ; v1(-10,6.3) R4.2
  Top Layer w1: C2.2 8.65,20.5 11.3,17.85 J1.1
NetD2_1: D2.1 K1.2 | length 8.3
  Top Layer w0.2: D2.1 D2.1@7,-15.44
  Top Layer w1: D2.1@7,-15.44 7,-7.2
NetD2_2: D2.2 K1.5 Q.2 R5.1 | length 25.1
  Top Layer w0.6: Q.2 -11.95,-3.989 -11.776,-4.163 -11.662,-4.163 -10.525,-5.3 -8.7,-5.3 -6.8,-7.2 -5,-7.2 -3.6,-8.6 -3.6,-13.4 -2.198,-14.802 -2.198,-14.876 -1.875,-15.2 -1.8,-15.2 -1.94,-15.34 D2.2 -7.9,-15.5 -8,-15.6 -8,-16 R5.1
NetE2_A1: E2.A1 K1.1 | length 13
  Top Layer w1: K1.1@1,-9.2 2.609,-7.591 2.609,-5.809 3.317,-5.1 11,-5.1 11.06,-5.04 E2.A1
NetE2_A2: E2.A2 K1.3 | length 6.8
  Top Layer w0.2: K1.3@7,4.62 7,5 ; E2.A2@11.2,-0.1 E2.A2@11.2,0.42
  Top Layer w1: K1.3@7,4.62 E2.A2@11.2,0.42
NetIrLED_2: IrLED.2 R2.1 | length 5.1
  Top Layer w0.2: IrLED.2 -29.97,-13.77 -29.9,-13.7 -29.83,-13.77 -25.071,-13.77 R2.1
"NetLED1 RED_1": "LED1 RED.1" R4.1 | length 8.4
  Top Layer w0.2: -16.73,15 -16.5,15 -16.4,14.9 -14.1,14.9 -10.25,11.05 R4.1
NetLED_2: LED.2 R5.2 | length 3.8
  Top Layer w0.2: R5.2 -11.55,-15.75 -11.4,-15.6 -11.5,-15.5 LED.2@-11.5,-12.27
NetPTI_1: PTI.1 R3.1 U1.3 | length 15
  Top Layer w0.2: PTI.1 -28.03,-3.73 -28.1,-3.8 -28.2,-3.7 -28.2,2 -27.399,2.801 R3.1 -25.9,2.901 -25.9,6.5 -25.535,6.865 -23.835,6.865 -23.7,7 -23.565,6.865 U1.3
NetQ_1: Q.1 R6.2 | length 4
  Top Layer w0.2: R6.2 -11.55,-1.05 -11.7,-1.2 -11.1,-1.2 -10.7,-1.6 -10.7,-2.3 -10.1,-2.9 -10.1,-3.825 Q.1
NetR1_2: R1.2 U1.2 | length 8.8
  Top Layer w0.2: R1.2 -29.6,4 -25.465,8.135 U1.2
NetR6_1: R6.1 U2.2 | length 15
  Top Layer w0.2: U2.2 -20.825,-4.825 -20.2,-4.2 -20.2,-1.717 -20.083,-1.6 -17.6,-1.6 -14.9,1.1 -12.7,1.1 -11.8,2 -11.7,2 -11.65,2.05 R6.1
Reset: U2.4 U2.15 | length 13.4
  Top Layer w0.2: v1(-24.1,-7) -23.965,-7 -23.6,-7.365 U2.4 ; U2.15 -15.225,-4.825 v1(-15.2,-4.8)
  Bottom Layer w0.2: v1(-24.1,-7) -17.4,-7 v1(-15.2,-4.8)
TRIGGER: "LED1 RED.2" C4.2 P1.2 U1.1 U2.14 | length 32.5
  Top Layer w0.2: C4.2 -24.7,15.5 C4.2@-23.75,15.5 ; -19.27,15 -22.2,15 -22.7,15.5 C4.2@-23.75,15.5 ; v1(-19.1,-0.5) -20.04,0.44 P1.2 -20.8,2.76 -20.8,8.6 -21.605,9.405 U1.1 -23.55,9.505 -23.55,15.3 C4.2@-23.75,15.5 ; v1(-18.415,-5.196) -17.955,-5.656 -17.639,-5.656 -17.2,-6.095 U2.14
  Bottom Layer w0.2: v1(-19.1,-0.5) -18.5,-1.1 -18.5,-5.281 v1(-18.415,-5.196)
pads on no net: K1.4 U1.7 U2.1 U2.3 U2.5 U2.6 U2.7 U2.9 U2.10 U2.11 U2.12

## Polygon pours and split planes (outlines as drawn)
GND on Layer 1 "GND_L02_P000" (solid, remove dead copper, pour order 0): -34.4,-17.9 -34.4,23.4 26,23.4 26.1,23.3 26.1,-18
GND on Layer 2 "GND_L03_P001" (solid, remove dead copper, pour order 1): -34.4,-17.8 -34.4,23.4 25.9,23.4 26.1,23.2 26.1,-17.9

## Text inside footprints (layer, text, board x,y; h text height)
C2: Top Overlay "+" at 4,11.1 h1.22 r270
C4: Top Overlay "+" at -32.85,16.5 h1.22 r180
E2: Top Overlay "A1" at 11.8,-10.57 h1.5 r90